# EAGLE board schematics (EAGLE 9.5.1)
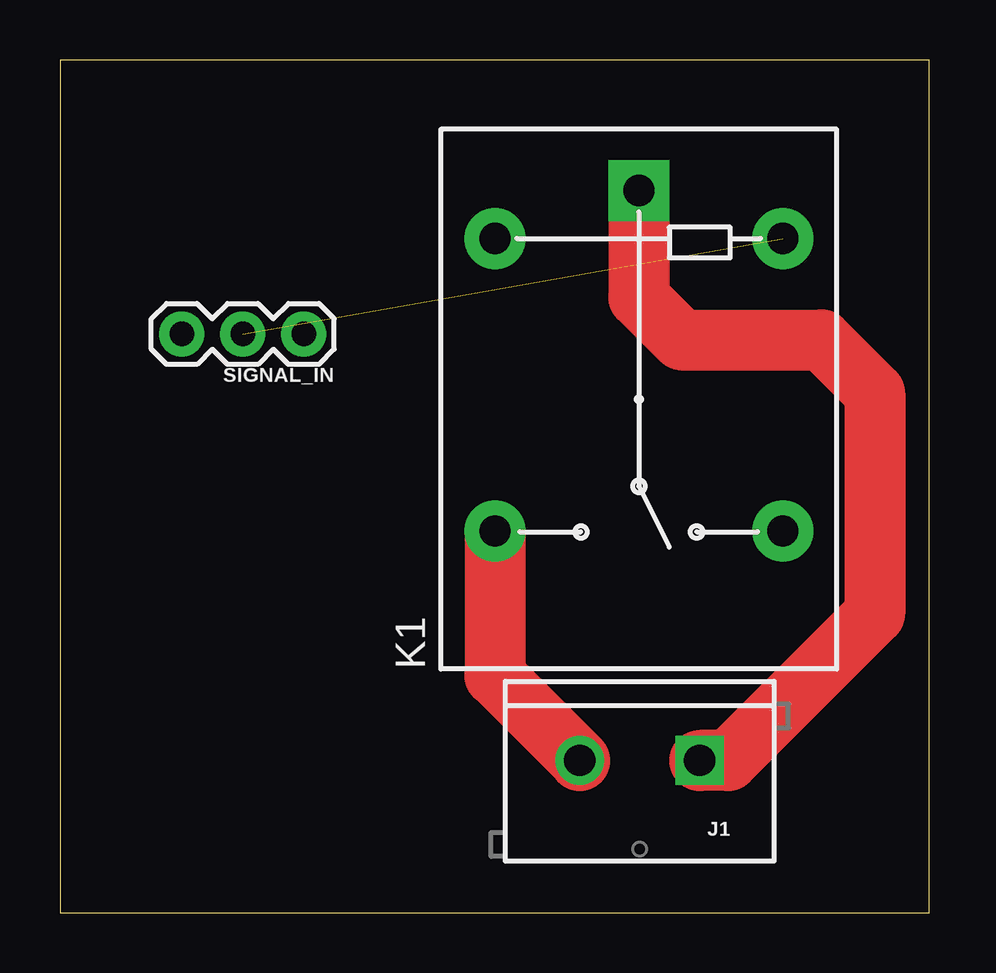
[diagram p0: board, top side]
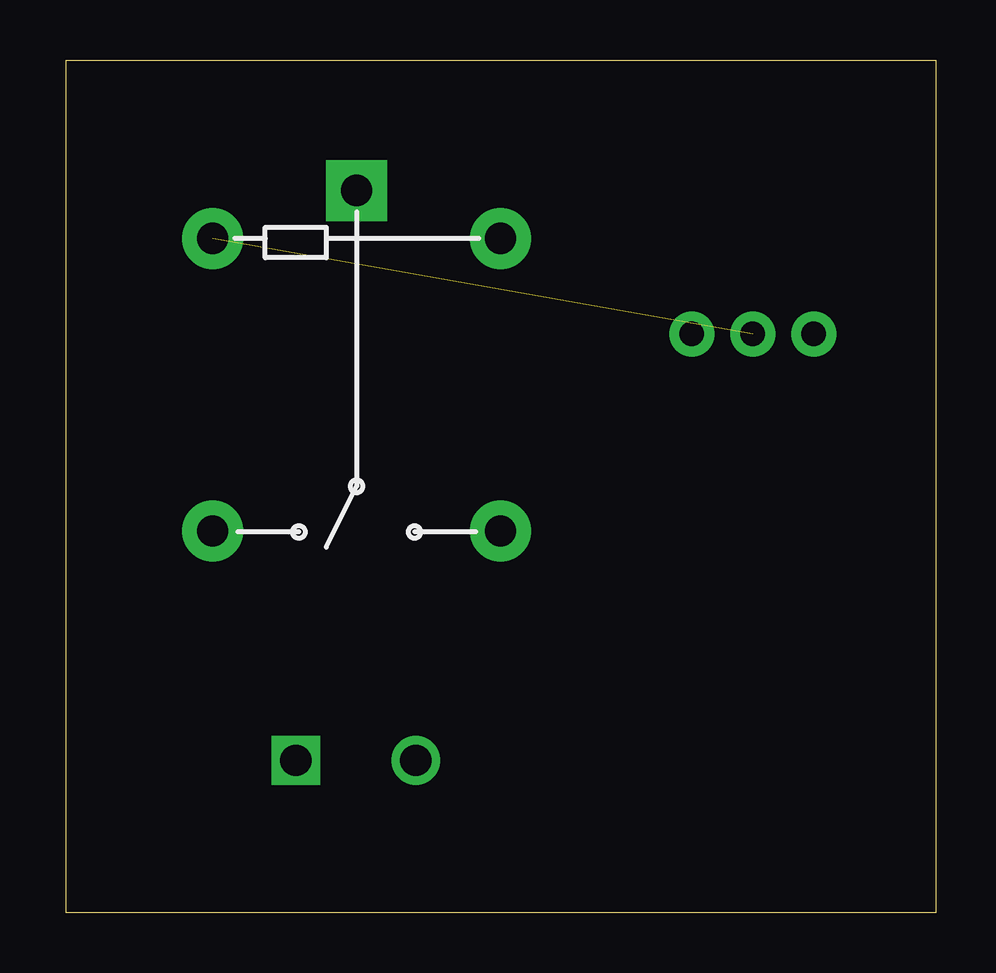
[diagram p1: board, bottom side, seen from below]

Size 36.25 x 35.55 mm. Coordinates in mm from the lower left corner, seen from the top.
Outline: 0,0 36.25,0 36.25,35.55 0,35.55 0,0
Copper layers (1*16): Top 0.035mm / dielectric 1.5mm / Bottom 0.035mm
Design rules "default": minimum track width 6mil, minimum drill 0.35mm, track to track 6mil, track to pad 6mil, pad to pad 6mil, via to via 6mil, smd to smd 6mil, copper to edge 40mil, drill to drill 6mil, minimum pad ring 10mil, minimum via ring 8mil, stop-mask expansion 4mil, vias tented up to drill 0mil, thermal gap 10mil

## Footprints (pad centres in the part's own frame; a part is rotated, then mirrored left to right if it is on the bottom)
SCREWTERMINAL-5MM-2 = drill 1.3 pad 2.032 square: 1 0,0 | drill 1.3 pad 2.032: 2 5,0
RELAY_G5LE = drill 1.3 pad 2.54 square: 1 8.52,-0.005 | drill 1.3 pad 2.54: 2 6.52,5.995; 3 -5.68,5.995; 4 -5.68,-6.005; 5 6.52,-6.005
1X03 = drill 1.016 pad 1.88: 1 0,0; 2 2.54,0; 3 5.08,0

## Placement (x,y rotation side)
J1  [SCREWTERMINAL-5MM-2]  26.67,6.35 180 top
K1  RELAY-SPDT  [RELAY_G5LE]  24.13,21.59 90 top
SIGNAL_IN  [1X03]  10.16,24.13 180 top

## Library data of the parts
J1 = SparkFun-Connectors; SF_SKU: PRT-08432
K1 = SparkFun-Electromechanical; PROD_ID: COMP-14214
SIGNAL_IN = SparkFun-Connectors; PROD_ID: XXX-00000

## Nets
5V: K1.5 SIGNAL_IN.2
GND: SIGNAL_IN.3
N$3: J1.2 K1.3
N$4: J1.1 K1.1
TRIGGER: SIGNAL_IN.1

## Tracks (layer width: path | path; a pad name or v marks a point on that pad's centre or on a via)
5V  (1 unrouted)
N$3
  Top 2.54: K1.3 18.14,9.88 J1.2
N$4
  Top 2.54: K1.1 24.14,25.65 25.91,23.88 31.75,23.88 33.96,21.67 33.96,12.45 27.86,6.35 J1.1